# EAGLE board ME433_songwei (EAGLE 8.1.0)
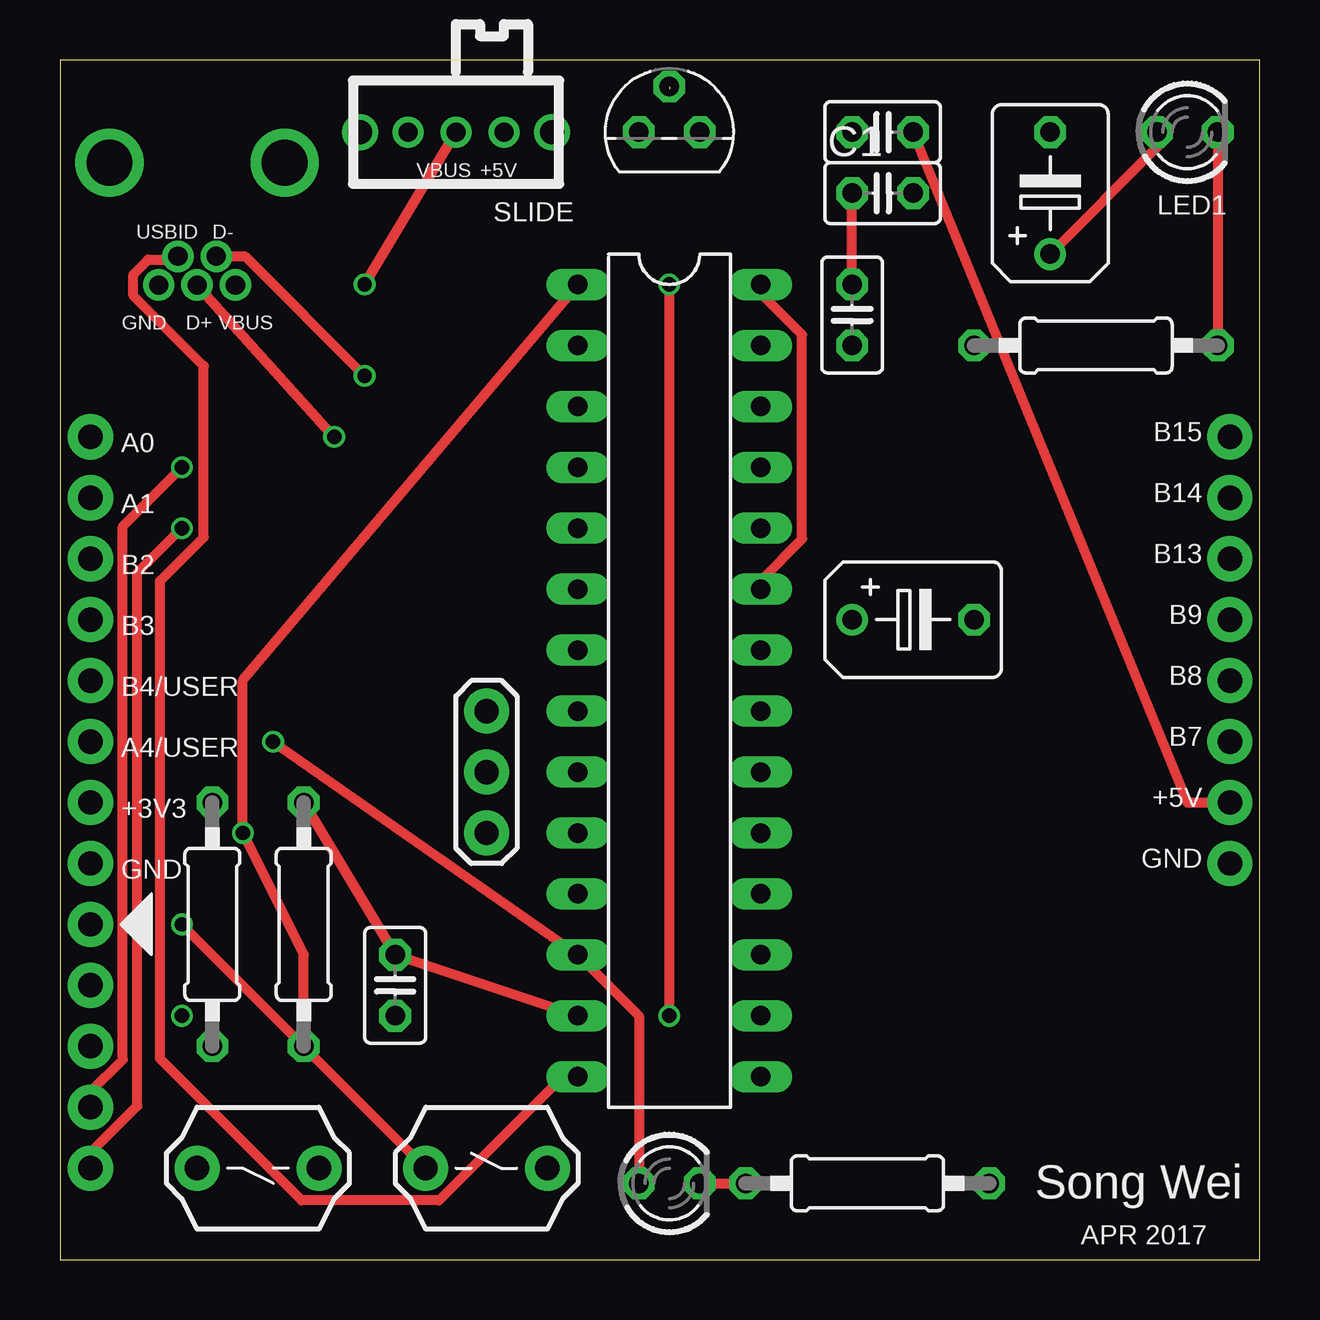
[diagram p0: board, top side]
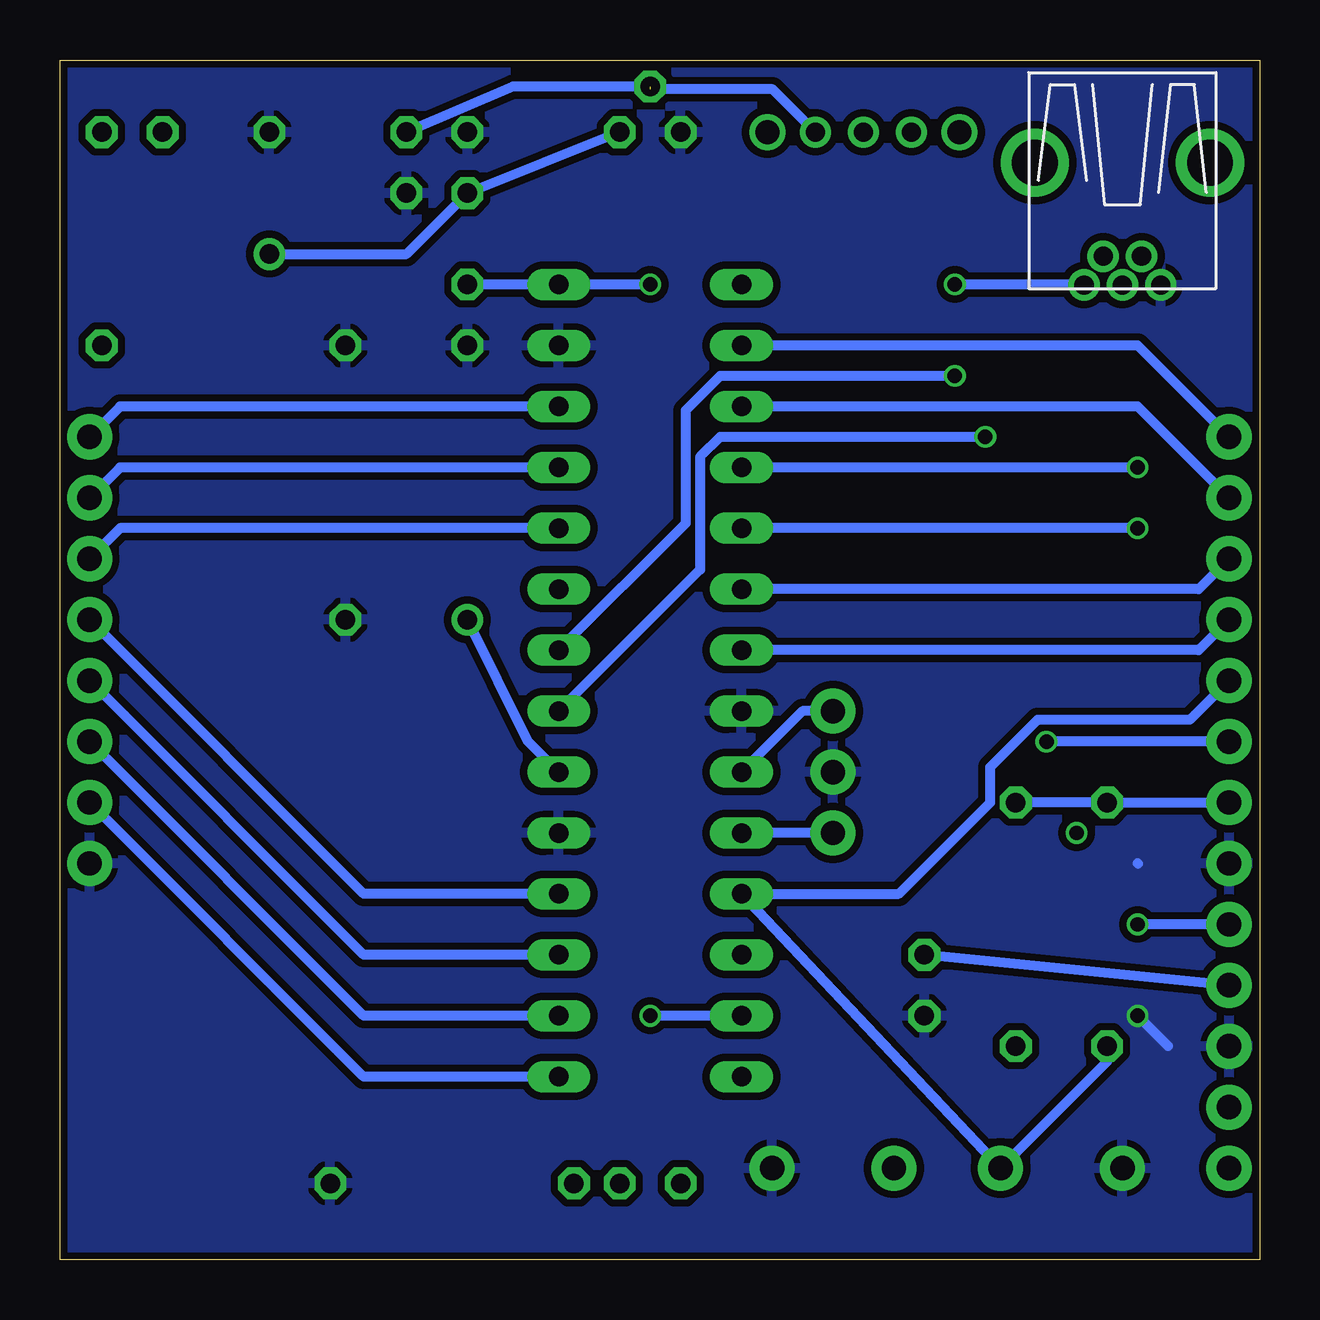
[diagram p1: board, bottom side, seen from below]

Size 50 x 50 mm. Coordinates in mm from the lower left corner, seen from the top.
Outline: 0,0 50,0 50,50 0,50 0,0
Copper layers (1*16): Top 0.035mm / dielectric 1.5mm / Bottom 0.035mm
Design rules "SeeedStudio_2layer_DRU_no_angle_20140221": minimum track width 6mil, minimum drill 12mil, track to track 6mil, track to pad 6mil, pad to pad 6mil, via to via 6mil, smd to smd 0mil, copper to edge 10mil, drill to drill 10mil, minimum pad ring 10mil, minimum via ring 6mil, stop-mask expansion 2mil, vias tented up to drill 100mil, thermal gap 10mil

## Footprints (pad centres in the part's own frame; a part is rotated, then mirrored left to right if it is on the bottom)
C025-025X050 = drill 0.813 octagon: 1 -1.27,0; 2 1.27,0
B45181B = drill 0.813: + -2.54,0 | drill 0.813 octagon: - 2.54,0
USB-MB-H = drill 0.8: D+ 5.1,0; D- 3.9,0.8; GND 5.1,-1.6; ID 3.9,-0.8; VBUS 5.1,1.6 | drill 1.9: P$6 0,-3.65; P$7 0,3.65
LED3MM = drill 0.813 octagon: A -1.27,0; K 1.27,0
0207/10 = drill 0.813 octagon: 1 -5.08,0; 2 5.08,0
DIL28-3 = drill 0.813 long: 1 -16.51,-3.81; 2 -13.97,-3.81; 3 -11.43,-3.81; 4 -8.89,-3.81; 5 -6.35,-3.81; 6 -3.81,-3.81; 7 -1.27,-3.81; 8 1.27,-3.81; 9 3.81,-3.81; 10 6.35,-3.81; 11 8.89,-3.81; 12 11.43,-3.81; 13 13.97,-3.81; 14 16.51,-3.81; 15 16.51,3.81; 16 13.97,3.81; 17 11.43,3.81; 18 8.89,3.81; 19 6.35,3.81; 20 3.81,3.81; 21 1.27,3.81; 22 -1.27,3.81; 23 -3.81,3.81; 24 -6.35,3.81; 25 -8.89,3.81; 26 -11.43,3.81; 27 -13.97,3.81; 28 -16.51,3.81
SLIDE = drill 0.8: 1 -2,0; 2 0,0; 3 2,0 | drill 1: P$1 -4,0; P$2 4,0
TO92 = drill 0.813 octagon: 1 -1.27,0; 2 0,1.905; 3 1.27,0
PB = drill 1.016 pad 1.88: 1 -2.54,0; 2 2.54,0
1X08 = drill 1.016 pad 1.88: 1 0,0; 2 2.54,0; 3 5.08,0; 4 7.62,0; 5 10.16,0; 6 12.7,0; 7 15.24,0; 8 17.78,0
1X05 = drill 1.016 pad 1.88: 1 0,0; 2 2.54,0; 3 5.08,0; 4 7.62,0; 5 10.16,0
OSC = drill 1.016 pad 1.88: 1 -2.54,0; 2 0,0; 3 2.54,0

## Placement (x,y rotation side)
C1  0.1uF  [C025-025X050]  34.29,44.45 0 top
C2  0.1uF  [C025-025X050]  13.97,11.43 270 top
C3  0.1uF  [C025-025X050]  34.29,46.99 180 top
C4  0.1uF  [C025-025X050]  33.02,39.37 270 top
C5  10uF  [B45181B]  35.56,26.67 0 top
C6  10uF  [B45181B]  41.27,44.45 90 top
J1  USB-MB-H  [USB-MB-H]  5.71,45.72 270 top
LED1  Red  [LED3MM]  46.99,46.99 0 top
LED2  Green  [LED3MM]  25.4,3.17 0 top
R1  330  [0207/10]  43.18,38.1 0 top
R2  330  [0207/10]  33.66,3.17 180 top
R3  10k  [0207/10]  6.35,13.97 90 top
R4  10k  [0207/10]  10.16,13.97 90 top
U$1  PIC32MX250F128B  [DIL28-3]  25.4,24.13 270 top
U$2  SLIDE  [SLIDE]  16.51,46.99 0 top
U$3  MCP1702  [TO92]  25.4,46.99 0 top
U$4  RESET  [PB]  17.78,3.81 0 top
U$5  USER  [PB]  8.26,3.81 180 top
U$6  CONN_08  [1X08]  48.77,16.51 90 top
U$7  CONN_08  [1X08]  1.27,16.51 90 top
U$8  PICKIT3  [1X05]  1.27,13.97 270 top
U$10  8MHz  [OSC]  17.78,20.32 270 top

## Library data of the parts
C1-C6 R1-R4 = resistor
J1 U$1-U$8 U$10 = ME433_songwei
LED1 LED2 = led

## Nets
+3V3: C1.1 C2.1 C4.1 C6.+ LED1.A R3.2 R4.2 U$1.13 U$1.23 U$1.28 U$3.3 U$7.2 U$8.2
+5V: C3.1 U$1.15 U$2.3 U$3.2 U$6.2
A0: U$1.2 U$7.8
A1: U$1.3 U$7.7
A4/LED: LED2.A U$1.12 U$7.3
B2: U$1.6 U$7.6
B3: U$1.7 U$7.5
B4/USER: R3.1 U$1.11 U$5.1 U$7.4
B7: U$1.16 U$6.3
B8: U$1.17 U$6.4
B9: U$1.18 U$6.5
B13: U$1.24 U$6.6
B14: U$1.25 U$6.7
B15: U$1.26 U$6.8
D+: J1.D+ U$1.21
D-: J1.D- U$1.22
GND: C1.2 C2.2 C3.2 C4.2 C5.- C6.- J1.GND R1.1 R2.1 U$1.8 U$1.19 U$1.27 U$3.1 U$4.2 U$5.2 U$6.1 U$7.1 U$8.3 U$10.2
MCLR: R4.1 U$1.1 U$4.1 U$8.1
N$1: J1.VBUS U$2.2
N$2: U$1.9 U$10.1
N$3: U$1.10 U$10.3
N$4: C5.+ U$1.20
N$5: LED1.K R1.2
N$6: LED2.K R2.2
PGC: U$1.5 U$8.5
PGD: U$1.4 U$8.4
USBID: J1.ID U$1.14

## Tracks (layer width: path | path; a pad name or v marks a point on that pad's centre or on a via)
+3V3  (via drill 0.6)
  Top 0.406: R4.2 C2.1 U$1.13 | v25.4,10.16 v25.4,40.64 | C6.+ 45.72,46.35 LED1.A | C4.1 C1.1 | U$1.23 29.21,28.31 30.94,30.04 30.94,38.54 29.21,40.27 U$1.28
  Bottom 0.406: U$7.2 R3.2 R4.2 | U$1.13 v25.4,10.16 | v25.4,40.64 U$1.28 C4.1 | U$3.3 C1.1 35.56,41.91 C6.+ | U$1.23 29.21,28.31 | U$8.2 C2.1
+5V  (1 unrouted)
  Top 0.406: C3.1 46.99,19.05 U$6.2
  Bottom 0.406: U$3.2 31.11,48.9 C3.1 | U$2.3 20.3,48.78 25.4,48.78 | U$1.15 37.34,7.62 U$6.2
A0
  Bottom 0.406: U$7.8 5.08,38.1 U$1.2
A1
  Bottom 0.406: U$7.7 5.08,35.56 U$1.3
A4/LED  (via drill 0.6)
  Top 0.406: v8.88,21.58 U$1.12 24.13,10.16 LED2.A
  Bottom 0.406: U$7.3 v8.89,21.59 v8.88,21.58
B2
  Bottom 0.406: U$7.6 2.54,27.94 U$1.6
B3
  Bottom 0.406: U$7.5 2.54,25.4 U$1.7
B4/USER
  Bottom 0.406: U$7.4 2.91,22.49 9.26,22.49 11.23,20.52 11.23,19.05 15.04,15.24 U$1.11 U$5.1 6.35,8.26 R3.1
B7
  Bottom 0.406: U$1.16 37.34,10.16 U$6.3
B8
  Bottom 0.406: U$1.17 37.34,12.7 U$6.4
B9
  Bottom 0.406: U$1.18 37.34,15.24 U$6.5
B13
  Bottom 0.406: U$1.24 47.5,30.48 U$6.6
B14
  Bottom 0.406: U$1.25 47.5,33.02 U$6.7
B15
  Bottom 0.406: U$1.26 47.5,35.56 U$6.8
D+  (via drill 0.6)
  Top 0.406: J1.D+ v11.43,34.29
  Bottom 0.406: U$1.21 23.32,28.75 23.32,33.46 22.49,34.29 v11.43,34.29
D-  (via drill 0.6)
  Top 0.406: J1.D- 7.71,41.82 v12.7,36.83
  Bottom 0.406: U$1.22 23.93,30.68 23.93,35.39 22.49,36.83 v12.7,36.83
GND  (via drill 0.6)
  Bottom 0.406: 5.06,16.51 5.08,16.53 | v5.08,10.16 3.81,8.89
  pour Bottom (isolate 0.305): 0,49.53 0,0 50.16,0 50.16,50.16 0,50.16
MCLR  (via drill 0.6)
  Top 0.406: R4.1 10.16,12.7 v7.62,17.78 7.62,24.13 U$1.1 | R4.1 U$4.1 | v5.08,13.97 R4.1
  Bottom 0.406: U$8.1 v5.08,13.97
N$1  (via drill 0.6)
  Top 0.406: v12.7,40.64 U$2.2
  Bottom 0.406: J1.VBUS 7.33,40.64 v12.7,40.64
N$2
  Bottom 0.406: U$10.1 19.05,22.86 U$1.9
N$3
  Bottom 0.406: U$10.3 U$1.10
N$4
  Bottom 0.406: U$1.20 30.48,21.59 C5.+
N$5
  Top 0.406: LED1.K R1.2
N$6
  Top 0.406: LED2.K R2.2
PGC  (via drill 0.6)
  Top 0.406: v5.08,30.48 3.23,28.63 3.23,6.4 1.27,4.45 U$8.5
  Bottom 0.406: v5.08,30.48 U$1.5
PGD  (via drill 0.6)
  Top 0.406: U$8.4 1.27,6.99 2.62,8.33 2.62,30.56 v5.08,33.02
  Bottom 0.406: v5.08,33.02 U$1.4
USBID
  Top 0.406: J1.ID 4.78,41.68 3.68,41.68 3.06,41.06 3.06,40.18 5.99,37.25 5.99,30.1 4.17,28.28 4.17,8.37 10.07,2.46 15.8,2.46 20.95,7.62 U$1.14

## Text on the board
tNames: VBUS | +5V | USBID | D- | GND | D+ | VBUS | B15 | A0 | B14 | A1 | B13 | B2 | B9 | B3 | B8 | B4/USER | B7 | A4/USER | +5V | +3V3 | GND | GND | Song Wei | APR 2017
200bmp: F:/GitHub/wongsw_ME433_2017/HW2/ME433/Sis_turtle.bmp | F:/GitHub/wongsw_ME433_2017/HW2/ME433/cyndi_monkey.bmp